# Altium PCB PCB1.PcbDoc
Units mm, origin at the board's own origin, x right, y up, seen from the top; angles counter-clockwise.
Board outline 152.4 x 101.6 mm, 2 copper layers (Top Layer, Bottom Layer); 16 components, 23 nets, 82 pads, 0 vias.
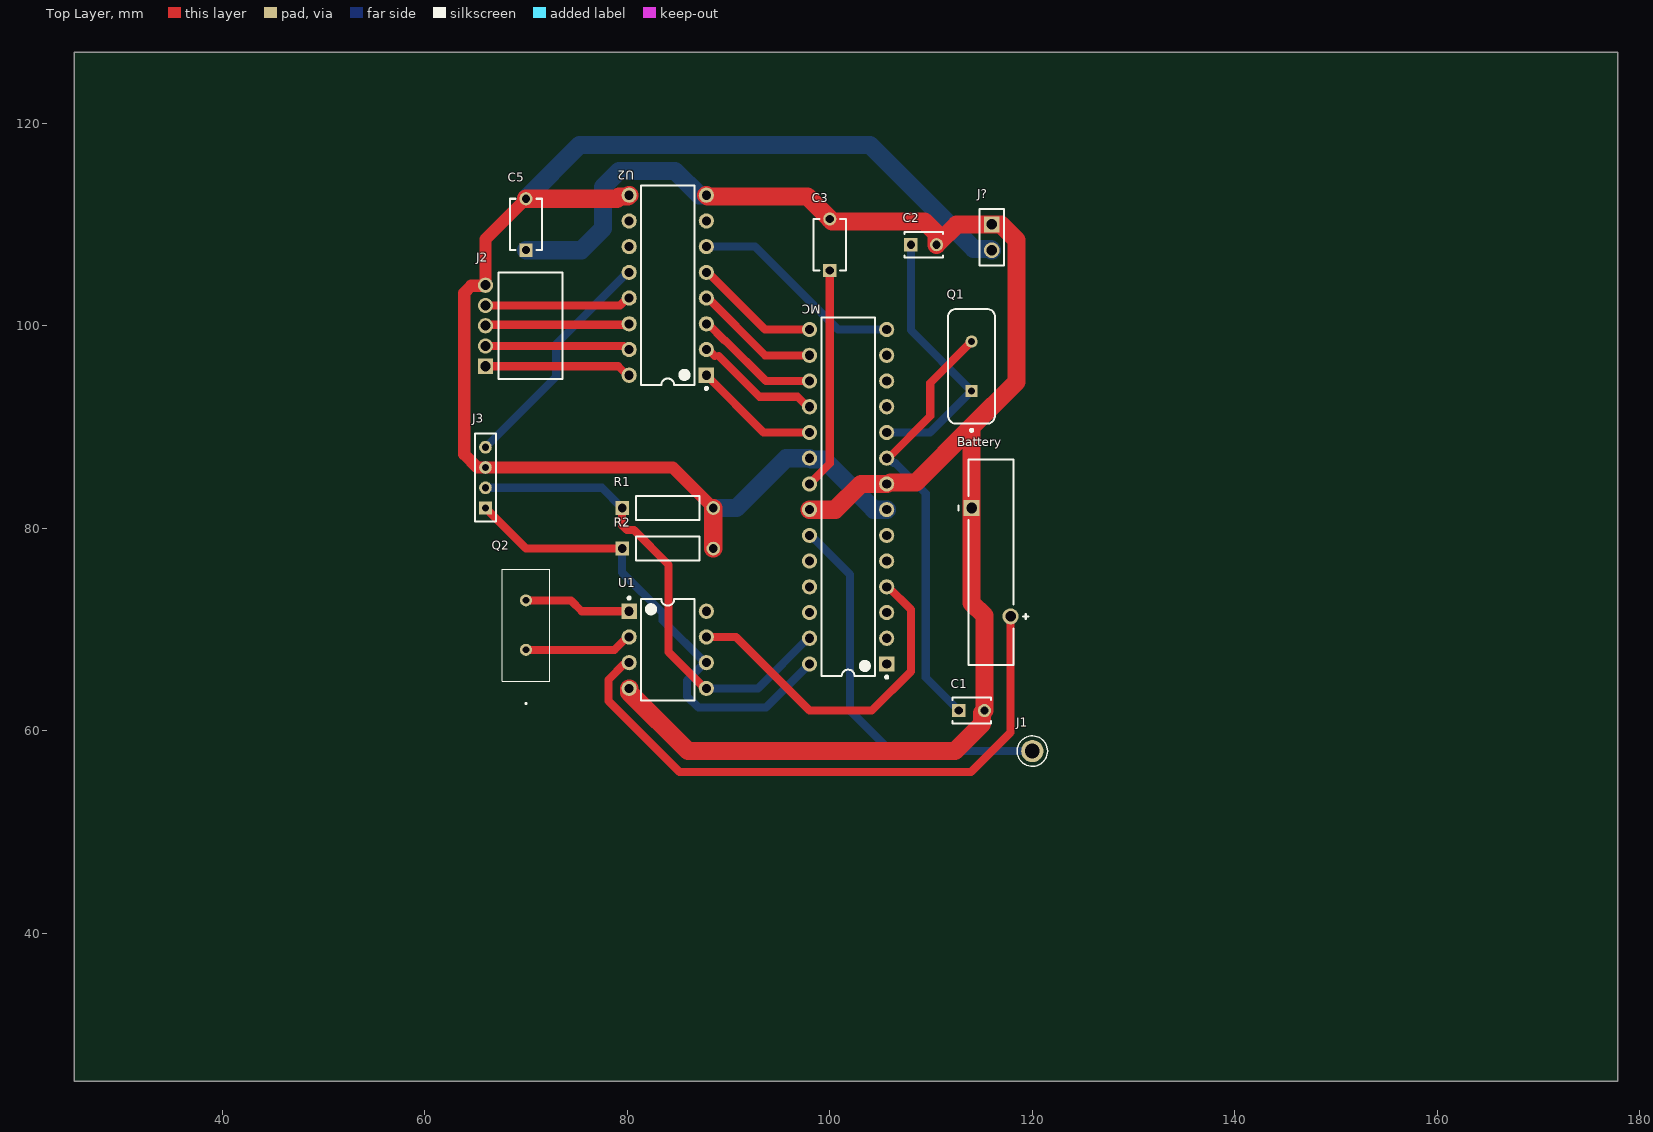
[diagram p0: Top Layer view]
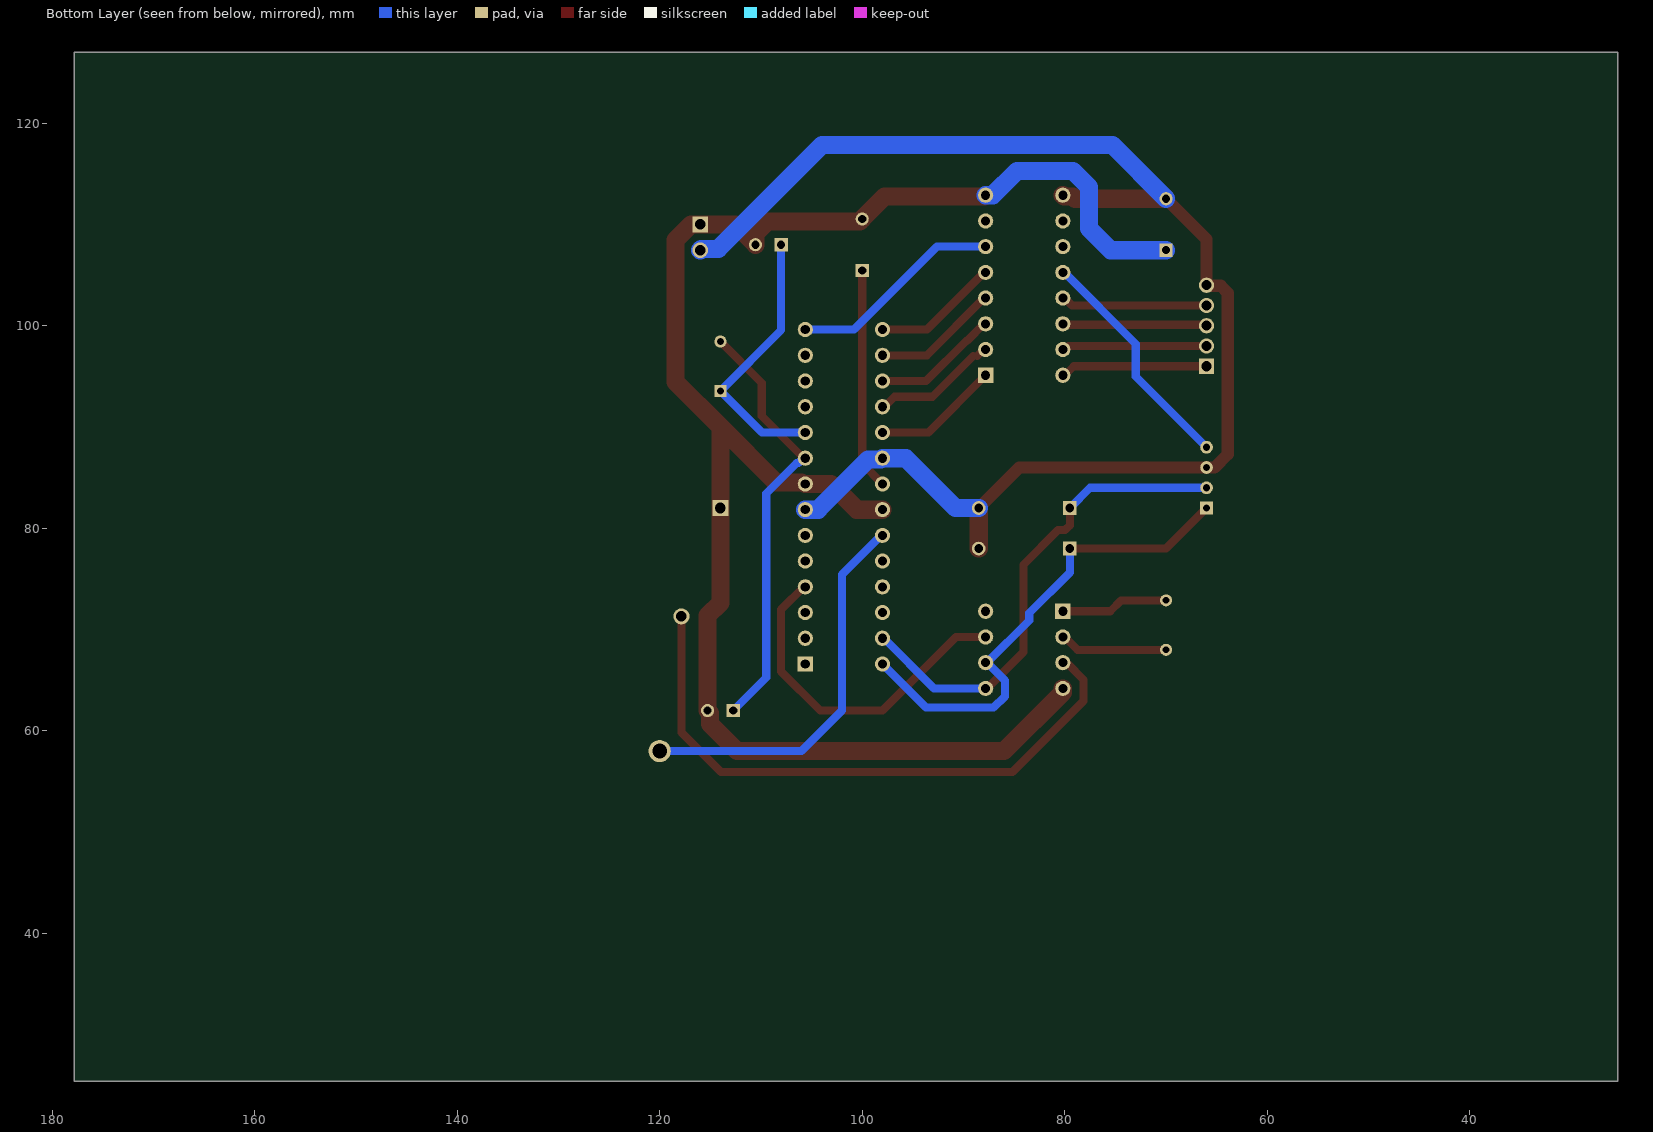
[diagram p1: Bottom Layer view, seen from below]

## Layer stack, top to bottom
Top Solder: solder mask 0.0102, Solder Resist, Dk 3.5
Top Layer: signal copper 0.0356
Dielectric 1: dielectric 0.32, FR-4, Dk 4.8
Bottom Layer: signal copper 0.0356
Bottom Solder: solder mask 0.0102, Solder Resist, Dk 3.5

## Board outline
25.4,25.4 177.8,25.4 177.8,127 25.4,127

## Design rules (kind name [scope] priority, off if disabled: settings)
AssemblyTestPointUsage [All] p0: scope1count=1 scope1_0_kind=Board scope1_0_value=Board scope2count=1 scope2_0_kind=Board scope2_0_value=Board commentlength=0
AssemblyTestpoint [All] p0: scope1count=1 scope1_0_kind=Board scope1_0_value=Board scope2count=1 scope2_0_kind=Board scope2_0_value=Board commentlength=0
Clearance [All] p0: scope1count=1 scope1_0_kind=Board scope1_0_value=Board scope2count=1 scope2_0_kind=Board scope2_0_value=Board commentlength=0 gap=0.75
Clearance [All] p1: gap=0.75 ignorepadtopadclearanceinfootprint=FALSE except(0.4: Arc-THPad Track-THPad; 0.5: THPad-THPad)
ComponentClearance [All] p0: scope1count=1 scope1_0_kind=Board scope1_0_value=Board scope2count=1 scope2_0_kind=Board scope2_0_value=Board commentlength=0 gap=0.254 collisioncheckmode=3
DiffPairsRouting [All] p0: scope1count=1 scope1_0_kind=Board scope1_0_value=Board scope2count=1 scope2_0_kind=Board scope2_0_value=Board commentlength=0
FabricationTestPointUsage [All] p0: scope1count=1 scope1_0_kind=Board scope1_0_value=Board scope2count=1 scope2_0_kind=Board scope2_0_value=Board commentlength=0 valid=0 allowmultiple=FALSE
FabricationTestpoint [All] p0: scope1count=1 scope1_0_kind=Board scope1_0_value=Board scope2count=1 scope2_0_kind=Board scope2_0_value=Board commentlength=0 side=3 testpointundercomponent=TRUE minsize=1.016 maxsize=2.54 preferedsize=1.524 minholesize=0 maxholesize=1.016 preferedholesize=0.813 testpointgrid=0.025
FanoutControl Fanout_BGA [All] p0 off: scope1count=1 scope1_0_kind=Board scope1_0_value=Board scope2count=1 scope2_0_kind=Board scope2_0_value=Board commentlength=69 // Protel DXP Scope 1 Expression Was: IsBGA   Fanout_BGA (Default Rule)
FanoutControl Fanout_LCC [All] p0 off: scope1count=1 scope1_0_kind=Board scope1_0_value=Board scope2count=1 scope2_0_kind=Board scope2_0_value=Board commentlength=69 // Protel DXP Scope 1 Expression Was: IsLCC   Fanout_LCC (Default Rule)
FanoutControl Fanout_SOIC [All] p0 off: scope1count=1 scope1_0_kind=Board scope1_0_value=Board scope2count=1 scope2_0_kind=Board scope2_0_value=Board commentlength=71 // Protel DXP Scope 1 Expression Was: IsSOIC   Fanout_SOIC (Default Rule)
FanoutControl Fanout_Small [All] p0 off: scope1count=1 scope1_0_kind=Board scope1_0_value=Board scope2count=1 scope2_0_kind=Board scope2_0_value=Board commentlength=84 // Protel DXP Scope 1 Expression Was: (CompPinCount < 5)   Fanout_Small (Default Rule)
FanoutControl Fanout_Default [All] p0: scope1count=1 scope1_0_kind=Board scope1_0_value=Board scope2count=1 scope2_0_kind=Board scope2_0_value=Board commentlength=30 // Fanout_Default (Default Rule)
Height [All] p0: scope1count=1 scope1_0_kind=Board scope1_0_value=Board scope2count=1 scope2_0_kind=Board scope2_0_value=Board commentlength=0
HoleSize [All] p0: scope1count=1 scope1_0_kind=Board scope1_0_value=Board scope2count=1 scope2_0_kind=Board scope2_0_value=Board commentlength=0 absolutevalues=TRUE maxlimit=2.54 minlimit=0.025 maxpercent=80.000 minpercent=20.000
HoleToHoleClearance [All] p0: scope1count=1 scope1_0_kind=Board scope1_0_value=Board scope2count=1 scope2_0_kind=Board scope2_0_value=Board commentlength=0
LayerPairs [All] p0: scope1count=1 scope1_0_kind=Board scope1_0_value=Board scope2count=1 scope2_0_kind=Board scope2_0_value=Board commentlength=0 enforce=TRUE
MinimumSolderMaskSliver [All] p0: scope1count=1 scope1_0_kind=Board scope1_0_value=Board scope2count=1 scope2_0_kind=Board scope2_0_value=Board commentlength=0
NetAntennae [All] p0: scope1count=1 scope1_0_kind=Board scope1_0_value=Board scope2count=1 scope2_0_kind=Board scope2_0_value=Board commentlength=0
PasteMaskExpansion [All] p0: scope1count=1 scope1_0_kind=Board scope1_0_value=Board scope2count=1 scope2_0_kind=Board scope2_0_value=Board commentlength=0 expansion=0
PlaneClearance [All] p0: scope1count=1 scope1_0_kind=Board scope1_0_value=Board scope2count=1 scope2_0_kind=Board scope2_0_value=Board commentlength=0 clearance=0.508
PlaneConnect [All] p0: scope1count=1 scope1_0_kind=Board scope1_0_value=Board scope2count=1 scope2_0_kind=Board scope2_0_value=Board commentlength=0 planeconnectstyle=Relief reliefexpansion=0.508 reliefentries=4 reliefconductorwidth=0.254 reliefairgap=0.254
PolygonConnect [All] p0: scope1count=1 scope1_0_kind=Board scope1_0_value=Board scope2count=1 scope2_0_kind=Board scope2_0_value=Board commentlength=0 connectstyle=Relief reliefconductorwidth=0.254 reliefentries=4 polygonreliefangle="90 Angle"
PolygonConnect [All] p1: connectstyle=Relief reliefconductorwidth=0.254 reliefentries=4 polygonreliefangle="90 Angle" airgapwidth=0.254
RoutingCorners [All] p0: scope1count=1 scope1_0_kind=Board scope1_0_value=Board scope2count=1 scope2_0_kind=Board scope2_0_value=Board commentlength=0 cornerstyle=45-Degree minsetback=2.54 maxsetback=2.54
RoutingLayers [All] p0: scope1count=1 scope1_0_kind=Board scope1_0_value=Board scope2count=1 scope2_0_kind=Board scope2_0_value=Board commentlength=0 top layer=Automatic bottom layer=Automatic
RoutingPriority [All] p0: scope1count=1 scope1_0_kind=Board scope1_0_value=Board scope2count=1 scope2_0_kind=Board scope2_0_value=Board commentlength=0
RoutingTopology [All] p0: scope1count=1 scope1_0_kind=Board scope1_0_value=Board scope2count=1 scope2_0_kind=Board scope2_0_value=Board commentlength=0 topology=Shortest
RoutingVias [All] p0: scope1count=1 scope1_0_kind=Board scope1_0_value=Board scope2count=1 scope2_0_kind=Board scope2_0_value=Board commentlength=0 holewidth=0.711 width=1.27 viastyle="Through Hole" minholewidth=0.711 minwidth=1.27 maxholewidth=0.711 maxwidth=1.27
RoutingVias [All] p1: holewidth=0.711 width=1.27 viastyle="Through Hole" minholewidth=0.711 minwidth=1.27 maxholewidth=0.711 maxwidth=1.27
ShortCircuit [All] p0: scope1count=1 scope1_0_kind=Board scope1_0_value=Board scope2count=1 scope2_0_kind=Board scope2_0_value=Board commentlength=0 allowed=FALSE
SilkToBoardRegionClearance [All] p0: scope1count=1 scope1_0_kind=Board scope1_0_value=Board scope2count=1 scope2_0_kind=Board scope2_0_value=Board commentlength=0
SilkToSilkClearance [All] p0: scope1count=1 scope1_0_kind=Board scope1_0_value=Board scope2count=1 scope2_0_kind=Board scope2_0_value=Board commentlength=0
SilkToSolderMaskClearance [All] p0 off: scope1count=1 scope1_0_kind=Board scope1_0_value=Board scope2count=1 scope2_0_kind=Board scope2_0_value=Board commentlength=44 // Protel DXP Scope 1 Expression Was: IsPad
SolderMaskExpansion [All] p0: scope1count=1 scope1_0_kind=Board scope1_0_value=Board scope2count=1 scope2_0_kind=Board scope2_0_value=Board commentlength=0 expansion=0.102
SolderMaskExpansion [All] p1: expansion=0.102 istentingtop=FALSE
UnRoutedNet [All] p0: scope1count=1 scope1_0_kind=Board scope1_0_value=Board scope2count=1 scope2_0_kind=Board scope2_0_value=Board commentlength=0
UnpouredPolygon [All] p0: scope1count=1 scope1_0_kind=Board scope1_0_value=Board scope2count=1 scope2_0_kind=Board scope2_0_value=Board commentlength=0
Width Width_1 [All] p0 off: scope1count=1 scope1_0_kind=Board scope1_0_value=Board scope2count=1 scope2_0_kind=Board scope2_0_value=Board commentlength=68 maxlimit=2 minlimit=1.2 preferedwidth=1.8 // Protel DXP Scope 1 Expression Was: (InNet('+5') OR InNet('GND'))
Width [All] p0: scope1count=1 scope1_0_kind=Board scope1_0_value=Board scope2count=1 scope2_0_kind=Board scope2_0_value=Board commentlength=0 maxlimit=0.9 minlimit=0.8 preferedwidth=0.8
Width Width_1 [(InNet('+5') OR InNet('GND'))] p1: maxlimit=2 minlimit=1.2 preferedwidth=1.8
Width [All] p2: maxlimit=0.9 minlimit=0.8 preferedwidth=0.8
30 further rules are at their usual default settings.

## Components (designator, comment, footprint, x,y, rotation, side; value= is the part's Value field where it differs from the comment)
Battery "CR-2032/VCN" FP-CR-2032-VCN-MFG 115.925,76.65 r90 top
C1 "C315C220K1G5TA" KEMT-C315-THT-2 114,62 r0 top
C2 "C315C220K1G5TA" KEMT-C315-THT-2 109.27,108 r0 top
C3 "C322C104K5R5TA" FP-C322C104K5R5TA-MFG 100,108 r90 top
C5 "C322C104K5R5TA" FP-C322C104K5R5TA-MFG 70,110 r90 top
J1 "1801-0-15-15-30-27-04-0" FP-1801-0-15-15-30-27-04-MFG 120,58 r0 top
J2 "SQT-105-01-L-S-RA" SMTC-SQT-105-01-X-S-RA 66,96 r90 top
J3 "MMS-104-01-T-SV" SMTC-MMS-104-01-X-SV 66,82 r90 top
J? "SSW-102-02-T-S" SMTC-SSW-102-02-X-S 116,110 r270 top
MC "ATmega328-PU" 28P3 101.81,83.11 r180 top
Q1 "FOXSLF/160-20" FOX-FOXSLF160-20 114,96 r90 top
Q2 "LFXTAL020408BULK" LFXTAL020408BULK 70,68 r90 top
R1 "MFR-25FBF52-4K75" RESA60-630X240 84,82 r0 top
R2 "MFR-25FBF52-4K75" RESA60-630X240 84,78 r0 top
U1 "DS1307+" P8+2 84,68 r0 top
U2 "ULN2003AN" N0016A 84,104 r180 top

## Footprints (in the part's own frame and the unit in brackets; to place one, negate y for a bottom-side part, rotate by r counter-clockwise, add the part's x,y. Pads: shape width x height; smd on the part's side, far side on the other; paste and mask are expansions set on the pad)
28P3 [mm] "28-Pin Plastic Dual In-Line Package (PDIP)"
  rect 1.5x1.5 hole 0.9: 1(-3.81,16.51)
  round 1.5 hole 0.9: 2(-3.81,13.97) 3(-3.81,11.43) 4(-3.81,8.89) 5(-3.81,6.35) 6(-3.81,3.81) 7(-3.81,1.27) 8(-3.81,-1.27) 9(-3.81,-3.81) 10(-3.81,-6.35) 11(-3.81,-8.89) 12(-3.81,-11.43) 13(-3.81,-13.97) 14(-3.81,-16.51) 15(3.81,-16.51) 16(3.81,-13.97) 17(3.81,-11.43) 18(3.81,-8.89) 19(3.81,-6.35) 20(3.81,-3.81) 21(3.81,-1.27) 22(3.81,1.27) 23(3.81,3.81) 24(3.81,6.35) 25(3.81,8.89) 26(3.81,11.43) 27(3.81,13.97) 28(3.81,16.51)
  silkscreen extent -3.94,-17.7 2.65,17.93
FOX-FOXSLF160-20 [mm] "THD, 2-Leads, Body 11.35x4.65mm"
  rect 1.2x1.2 hole 0.7: 1(-2.44,0)
  round 1.2 hole 0.7: 2(2.44,0)
  silkscreen extent -6.45,-2.32 5.68,2.32
FP-1801-0-15-15-30-27-04-MFG [mm]
  round 2.2 hole 1.45 paste-1000 mask+0: 1(0,0)
  silkscreen extent -1.5,-1.5 1.5,1.5
FP-C322C104K5R5TA-MFG [mm]
  rect 1.3x1.3 hole 0.8 paste-1000 mask+0: 1(-2.54,0)
  round 1.3 hole 0.8 paste-1000 mask+0: 2(2.54,0)
  silkscreen extent -2.54,-1.59 2.54,1.59
FP-CR-2032-VCN-MFG [mm]
  rect 1.6x1.6 hole 1.05 paste-1000 mask+0: 1(5.35,1.925)
  round 1.6 hole 1.05 paste-1000 mask+0: 2(-5.35,-1.925)
  silkscreen extent -10.15,-3.67 10.15,3.22
KEMT-C315-THT-2 [mm] "THD, 2-Leads, Body 3.81x2.54mm"
  rect 1.3x1.3 hole 0.8: 1(-1.27,0)
  round 1.3 hole 0.8: 2(1.27,0)
  silkscreen extent -1.91,-1.27 1.91,1.27
LFXTAL020408BULK [mm]
  round 1.192 hole 0.65: 1(0,0) 2(4.88,0)
  silkscreen extent -5.36,-2.32 7.97,2.32
N0016A [mm] "DIP, 16-Leads, Body 19.7x6.6mm, Pitch 2.54mm"
  rect 1.5x1.5 hole 0.9: 1(-3.81,8.89)
  round 1.5 hole 0.9: 2(-3.81,6.35) 3(-3.81,3.81) 4(-3.81,1.27) 5(-3.81,-1.27) 6(-3.81,-3.81) 7(-3.81,-6.35) 8(-3.81,-8.89) 9(3.81,-8.89) 10(3.81,-6.35) 11(3.81,-3.81) 12(3.81,-1.27) 13(3.81,1.27) 14(3.81,3.81) 15(3.81,6.35) 16(3.81,8.89)
  silkscreen extent -3.94,-9.85 2.65,10.31
P8+2 [mm] "DIP, 8-Leads, Row Spacing 7.62mm, Pitch 2.54mm, Body 9.4x7mm"
  rect 1.5x1.5 hole 0.9: 1(-3.81,3.81)
  round 1.5 hole 0.9: 2(-3.81,1.27) 3(-3.81,-1.27) 4(-3.81,-3.81) 5(3.81,-3.81) 6(3.81,-1.27) 7(3.81,1.27) 8(3.81,3.81)
  silkscreen extent -3.93,-5 2.65,5.23
RESA60-630X240 [mm] "Axial Resistor, 2-Leads, Dia 2.4mm, Body Length 6.3mm"
  rect 1.35x1.35 hole 0.85: 1(-4.5,0)
  round 1.35 hole 0.85: 2(4.5,0)
  silkscreen extent -3.15,-1.2 3.15,1.2
SMTC-MMS-104-01-X-SV [mm] "Through Hole Box Connector Strip Assembly, 1x4 Pins, Vertical, 2mm Pitch, Female"
  rect 1.25x1.25 hole 0.711: 1(0,0)
  round 1.25 hole 0.711: 2(2,0) 3(4,0) 4(6,0)
  silkscreen extent -1.35,-1.03 7.34,1.03
SMTC-SQT-105-01-X-S-RA [mm] "Socket Strip Assembly, 1x5 Pins, Right Anlge, 2mm Pitch, Female"
  rect 1.5x1.5 hole 0.99: 1(0,0)
  round 1.5 hole 0.99: 2(2,0) 3(4,0) 4(6,0) 5(8,0)
  silkscreen extent -1.28,-7.62 9.27,-1.27
SMTC-SSW-102-02-X-S [mm] "SQ Post Socket, 1x2 Pins, Vertical, 2.54mm Pitch, Female"
  rect 1.55x1.55 hole 1.04: 1(0,0)
  round 1.55 hole 1.04: 2(2.54,0)
  silkscreen extent -1.53,-1.2 4.07,1.2

## Part data
Battery: library part CMP-05417-000001-1, "BATTERY LITHIUM 3V COIN 20MM"
C1 C2: library part CMP-1664-00008-1, "Capacitor, Ceramic, 22 pF, +/-10 %, 100 V, -55 to 125 degC, 2-Pin THD, RoHS, Bulk"
C3 C5: library part CMP-03020-034661-1, "CAP CER 0.1UF 50V X7R RADIAL"
J1: library part CMP-07777-000001-1, "CONN PIN RCPT .015-.025 PRESSFIT"
J2: library part CMP-1021-00083-1, "Cost-Effective Rugged Socket, Through-hole, Right Angle, -55 to 125 degC, 2 mm Pitch, 5-Pin, Female, RoHS"
J3: library part CMP-1022-00068-1, "Tiger Claw(TM) Socket Strip, Through-hole, Vertical, -55 to 105 degC, 2 mm Pitch, 4-Pin, Female, RoHS"
J?: library part CMP-1023-00323-1, "SQ Post Socket, Through-hole, Vertical, -55 to 105 degC, 2.54 mm Pitch, 2-Pin, Female, RoHS"
MC: library part CMP-0095-00015-2, "8-bit AVR Microcontroller, 32KB Flash, 1KB EEPROM, 2KB SRAM, 28-pin PDIP, Industrial Grade (-40°C to 85°C)"
Q1: library part CMP-1749-00003-1, "Resistance Weld Thru-Hole Crystal, 16 MHz, -20 to 70 degC, 2-Pin THD, RoHS, Bulk"
Q2: "Crystal or Oscillator"
R1 R2: library part CMP-1659-00066-1, "Axial Resistor, 4.75 KOhm, +/- 1%, 0.25 W, -55 to 155 degC, 2-Pin THD, RoHS, Bulk"
U1: library part CMP-0254-00152-1, "64 x 8, Serial, I2C Real-Time Clock, 5.0V, 8-Pin PDIP, 0 to 70 degC, Pb-Free"
U2: library part CMP-2000-07352-1, "High-Voltage, High-Current Darlington Transistor Array, 50 V, 500 mA, -20 to 70 degC, 16-Pin PDIP (N), Pb-Free (RoHS), Tube"

## Nets (pads, with @x,y where several pads share a name; then routed paths per layer and width w, separated by ;. In a path a pad name is that pad's centre, name@x,y a point inside that pad or via, vN(x,y) a via of type N, cw(c..) or ccw(c..) an arc to the next point about the centre after c; other vN are vias at no path point)
+5: C5.2 J2.5 J3.3 J?.2 MC.7 MC.20 R1.2 R2.2 U2.9 | length 143.4
  Top Layer w1.2: C5.2 66,108.54 J2.5 65.943,103.943 64.603,103.943 63.9,103.24 63.9,87.307 65.197,86.01 65.99,86.01 J3.3 84.5,86 R1.2
  Top Layer w1.8: C5.2 78.986,112.54 79.196,112.75 80.05,112.75 U2.9 ; R2.2 R1.2
  Bottom Layer w1.8: C5.2 75.3,117.84 103.953,117.84 114.218,107.575 115.885,107.575 J?.2 ; R1.2 90.79,82 95.71,86.92 MC.20 98.14,86.78 99.41,86.78 104.35,81.84 MC.7
GND: Battery.1 C1.2 C2.2 C3.2 C5.1 J?.1 MC.8 MC.22 U1.4 U2.8 | length 167.1
  Top Layer w1.8: U1.4 80.19,63.81 86,58 112.363,58 115.03,60.667 115.03,61.76 C1.2 115.27,71.365 114,72.635 Battery.1 114,90.027 ; U2.8 87.95,112.75 97.79,112.75 C3.2 100.24,110.3 109.333,110.3 110.54,109.093 C2.2 112.54,110 J?.1 116.889,110 118.425,108.464 118.425,94.452 114,90.027 ; MC.22 100.54,81.84 103.08,84.38 MC.8 ; MC.8@106,84.52 108.493,84.52 114,90.027
  Bottom Layer w1.8: C5.1 75.46,107.46 77.598,109.598 77.598,113.692 79.196,115.29 84.71,115.29 87.11,112.89 U2.8
NetBattery_2: Battery.2 U1.3 | length 60.5
  Top Layer w0.8: U1.3 80.056,66.596 79.697,66.596 78.14,65.039 78.14,62.961 85.151,55.95 113.95,55.95 117.85,59.85 Battery.2
NetC1_1: C1.1 MC.9 Q1.2 | length 43.2
  Top Layer w0.8: MC.9 105.767,86.92 109.923,91.076 109.923,94.363 Q1.2
  Bottom Layer w0.8: MC.9 105.809,86.92 106.299,86.43 106.469,86.43 109.475,83.425 109.475,65.255 C1.1
NetC2_1: C2.1 MC.10 Q1.1 | length 27
  Bottom Layer w0.8: MC.10 109.9,89.46 Q1.1 108,99.56 C2.1
NetC3_1: C3.1 MC.21 | length 21.9
  Top Layer w0.8: MC.21 100,86.38 C3.1
NetJ1_1: J1.1 MC.23 | length 38.7
  Bottom Layer w0.8: MC.23 98.147,79.3 102,75.447 102,62 106,58 J1.1
NetJ2_1: J2.1 U2.16 | length 14.7
  Top Layer w0.8: J2.1 79.111,96 80.001,95.11 U2.16
  Bottom Layer w0.8: U2.16@80.001,95.11 U2.16
NetJ2_2: J2.2 U2.15 | length 14.5
  Top Layer w0.8: J2.2 79.651,98 80.001,97.65 U2.15
  Bottom Layer w0.8: U2.15@80.001,97.65 U2.15
NetJ2_3: J2.3 U2.14 | length 14.5
  Top Layer w0.8: J2.3 66.095,100.095 80.095,100.095 U2.14
  Bottom Layer w0.8: J2.3 J2.3@66.095,100.095 ; U2.14@80.095,100.095 U2.14
NetJ2_4: J2.4 U2.13 | length 14.7
  Top Layer w0.8: J2.4 79.271,102 80.001,102.73 U2.13
  Bottom Layer w0.8: U2.13@80.001,102.73 U2.13
NetJ3_1: J3.1 MC.28 R2.1 U1.6 | length 48.5
  Top Layer w0.8: J3.1 70,78 R2.1
  Bottom Layer w0.8: R2.1 79.5,75.626 83.504,71.622 83.504,70.889 U1.6@87.663,66.73 ; U1.6@87.801,66.665 U1.6@87.736,66.73 ; U1.6 U1.6@87.736,66.73 ; MC.28@97.935,66.665 MC.28 93.69,62.29 87.023,62.29 85.91,63.403 85.91,64.977 U1.6@87.663,66.73 ; U1.6@87.663,66.73 U1.6@87.736,66.73
NetJ3_2: J3.2 MC.27 R1.1 U1.5 | length 48.3
  Top Layer w0.8: R1.1 79.5,80.294 79.969,79.825 80.651,79.825 84.08,76.397 84.08,67.773 87.663,64.19 U1.5
  Bottom Layer w0.8: J3.2 77.5,84 R1.1 ; U1.5 92.903,64.19 97.853,69.14 MC.27
NetJ3_4: J3.4 U2.12 | length 23.2
  Bottom Layer w0.8: J3.4 72.987,94.987 72.987,98.214 80.043,105.27 U2.12
NetMC_4: MC.4 U1.7 | length 34.2
  Top Layer w0.8: U1.7 90.73,69.27 98,62 104.146,62 108,65.854 108,71.987 105.767,74.22 MC.4
NetMC_14: MC.14 U2.6 | length 21.2
  Bottom Layer w0.8: U2.6 92.62,107.81 100.81,99.62 MC.14
NetMC_15: MC.15 U2.5 | length 12.5
  Top Layer w0.8: U2.5@87.957,105.27 93.607,99.62 MC.15
  Bottom Layer w0.8: U2.5 U2.5@87.957,105.27
NetMC_16: MC.16 U2.4 | length 12.5
  Top Layer w0.8: U2.4@87.957,102.73 93.607,97.08 MC.16
  Bottom Layer w0.8: U2.4 U2.4@87.957,102.73
NetMC_17: MC.17 U2.3 | length 12.4
  Top Layer w0.8: U2.3@87.957,100.19 89.587,98.56 ; 89.678,98.56 93.698,94.54 MC.17
  Bottom Layer w0.8: U2.3 U2.3@87.957,100.19
NetMC_18: MC.18 U2.2 | length 12.1
  Top Layer w0.8: U2.2@87.999,97.65 88.639,97.01 ; 89.036,97.01 93.056,92.99 96.821,92.99 MC.18@97.811,92
  Bottom Layer w0.8: U2.2 U2.2@87.999,97.65 ; MC.18@97.811,92 MC.18
NetMC_19: MC.19 U2.1 | length 12.5
  Top Layer w0.8: U2.1 93.46,89.46 MC.19
NetQ2_1: Q2.1 U1.2 | length 10.7
  Top Layer w0.8: Q2.1 78.731,68 80.001,69.27 U1.2
NetQ2_2: Q2.2 U1.1 | length 10.6
  Top Layer w0.8: Q2.2 74.438,72.88 75.508,71.81 U1.1
pads on no net: MC.1 MC.2 MC.3 MC.5 MC.6 MC.11 MC.12 MC.13 MC.24 MC.25 MC.26 U1.8 U2.7 U2.10 U2.11